# EAGLE board Galaksija keyboard adapter (EAGLE 9.6.2)
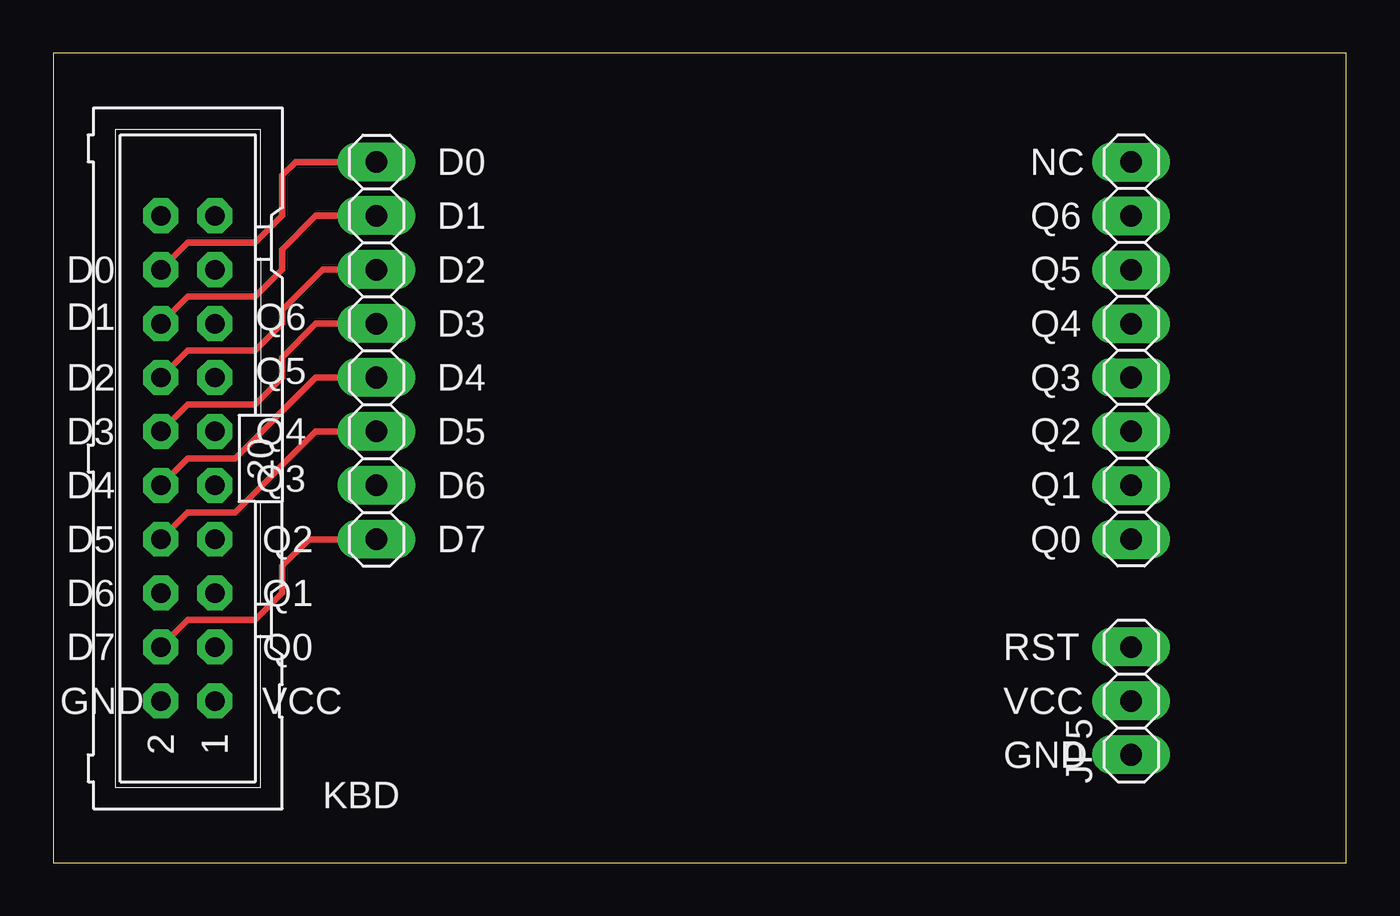
[diagram p0: board, top side]
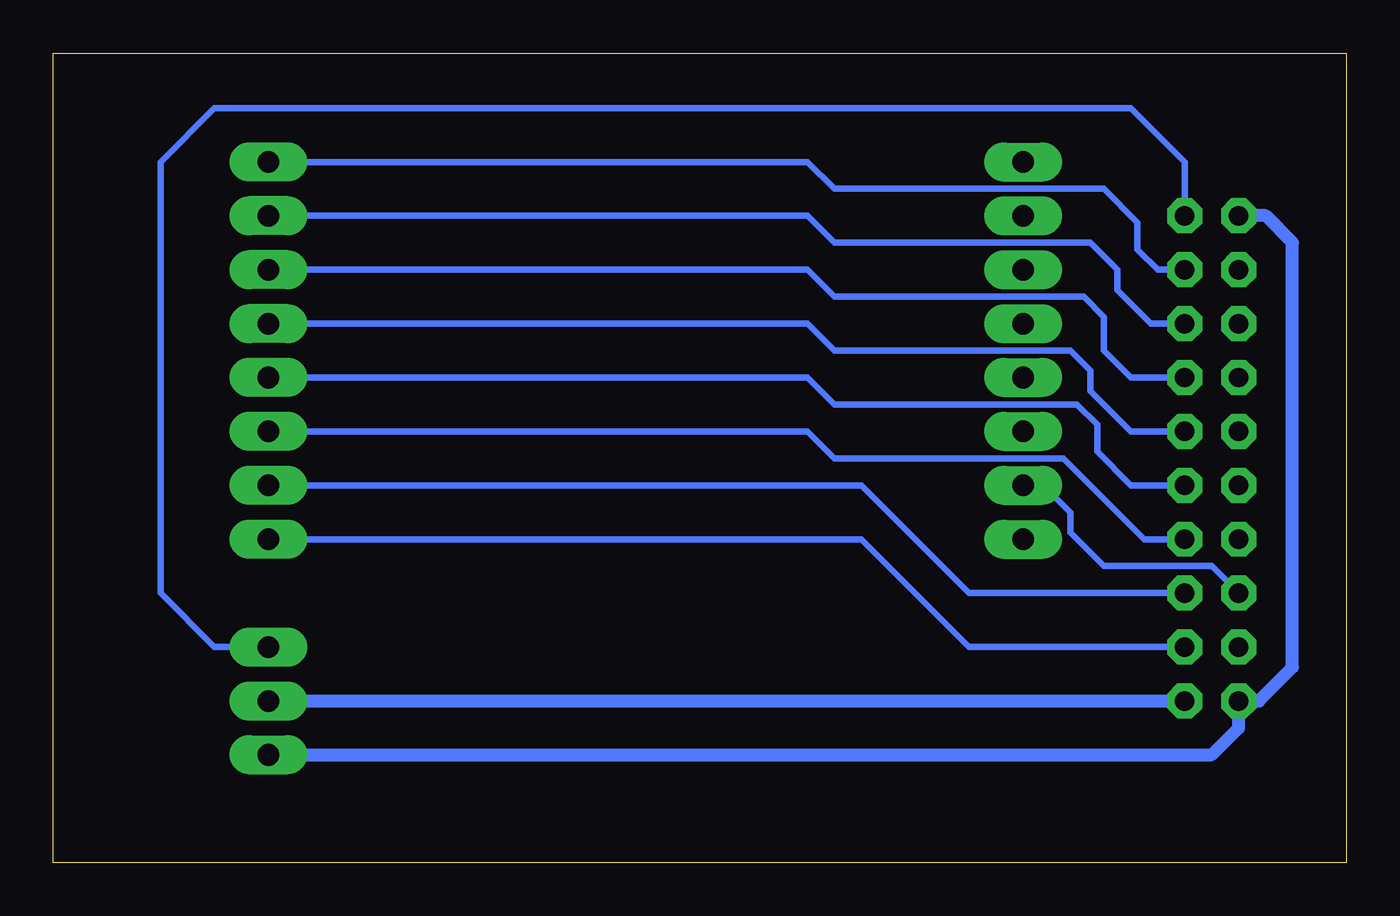
[diagram p1: board, bottom side, seen from below]

Size 60.94 x 38.15 mm. Coordinates in mm from the lower left corner, seen from the top.
Outline: 0,0 60.94,0 60.94,38.15 0,38.15 0,0
Copper layers (1*16): Top 0.035mm / dielectric 1.6mm / Bottom 0.035mm
Design rules "jlcpcb-2layers": minimum track width 5mil, minimum drill 0.3mm, track to track 5mil, track to pad 5mil, pad to pad 5mil, via to via 5mil, smd to smd 5mil, copper to edge 0.2mm, drill to drill 6mil, minimum pad ring 10mil, minimum via ring 3mil, stop-mask expansion 4mil, vias tented up to drill 0mil, thermal gap 10mil

## Footprints (pad centres in the part's own frame; a part is rotated, then mirrored left to right if it is on the bottom)
1X08 = drill 1.016 long: 1 -8.89,0; 2 -6.35,0; 3 -3.81,0; 4 -1.27,0; 5 1.27,0; 6 3.81,0; 7 6.35,0; 8 8.89,0
ML20 = drill 0.914 octagon: 1 -11.43,-1.27; 2 -11.43,1.27; 3 -8.89,-1.27; 4 -8.89,1.27; 5 -6.35,-1.27; 6 -6.35,1.27; 7 -3.81,-1.27; 8 -3.81,1.27; 9 -1.27,-1.27; 10 -1.27,1.27; 11 1.27,-1.27; 12 1.27,1.27; 13 3.81,-1.27; 14 3.81,1.27; 15 6.35,-1.27; 16 6.35,1.27; 17 8.89,-1.27; 18 8.89,1.27; 19 11.43,-1.27; 20 11.43,1.27
1X03 = drill 1.016 long: 1 -2.54,0; 2 0,0; 3 2.54,0

## Placement (x,y rotation side)
JP1  X3  [1X08]  15.24,24.13 90 top
JP2  X2  [1X08]  50.8,24.13 270 top
JP3  KDB  [ML20]  6.35,19.05 90 top
JP5  PWR  [1X03]  50.8,7.62 90 top

## Library data of the parts
JP1 JP2 JP5 = pinhead
JP3 = con-harting-ml; OC_FARNELL: unknown; OC_NEWARK: unknown

## Nets
D0: JP1.8 JP3.18
D1: JP1.7 JP3.16
D2: JP1.6 JP3.14
D3: JP1.5 JP3.12
D4: JP1.4 JP3.10
D5: JP1.3 JP3.8
D6: JP1.2 JP3.6
D7: JP1.1 JP3.4
GND: JP3.2 JP3.20 JP5.1
NC: JP2.1 JP3.17
Q0: JP2.8 JP3.3
Q1: JP2.7 JP3.5
Q2: JP2.6 JP3.7
Q3: JP2.5 JP3.9
Q4: JP2.4 JP3.11
Q5: JP2.3 JP3.13
Q6: JP2.2 JP3.15
RST: JP3.19 JP5.3
VCC: JP3.1 JP5.2

## Tracks (layer width: path | path; a pad name or v marks a point on that pad's centre or on a via)
D0
  Top 0.305: JP1.8 11.43,33.02 10.79,32.38 10.79,30.48 9.53,29.21 6.35,29.21 JP3.18
D1
  Top 0.305: JP3.16 6.35,26.67 9.53,26.67 10.79,27.94 10.79,28.89 12.38,30.48 JP1.7
D2
  Top 0.305: JP3.14 6.35,24.13 9.53,24.13 10.79,25.4 10.79,26.04 12.7,27.94 JP1.6
D3
  Top 0.305: JP3.12 6.35,21.59 9.53,21.59 10.79,22.86 10.79,23.81 12.38,25.4 JP1.5
D4
  Top 0.305: JP3.10 6.35,19.05 8.57,19.05 12.38,22.86 JP1.4
D5
  Top 0.305: JP3.8 6.35,16.51 8.57,16.51 12.38,20.32 JP1.3
D6
  Bottom 0.305: JP3.6 6.35,13.97 11.43,13.97 13.02,15.56 13.02,16.51 14.29,17.78 JP1.2
D7
  Top 0.305: JP3.4 6.35,11.43 9.53,11.43 10.79,12.7 10.79,13.97 12.06,15.24 JP1.1
GND
  Bottom 0.61: JP5.1 6.35,5.08 5.08,6.35 JP3.2 4.13,7.62 2.54,9.21 2.54,29.21 3.81,30.48 JP3.20
NC
  Bottom 0.305: JP3.17 8.89,27.94 9.84,28.89 9.84,30.16 11.43,31.75 24.13,31.75 25.4,33.02 JP2.1
Q0
  Bottom 0.305: JP3.3 17.78,10.16 22.86,15.24 JP2.8
Q1
  Bottom 0.305: JP3.5 17.78,12.7 22.86,17.78 JP2.7
Q2
  Bottom 0.305: JP3.7 9.53,15.24 13.34,19.05 24.13,19.05 25.4,20.32 JP2.6
Q3
  Bottom 0.305: JP3.9 10.16,17.78 11.75,19.37 11.75,20.64 12.7,21.59 24.13,21.59 25.4,22.86 JP2.5
Q4
  Bottom 0.305: JP3.11 10.16,20.32 12.06,22.23 12.06,23.18 13.02,24.13 24.13,24.13 25.4,25.4 JP2.4
Q5
  Bottom 0.305: JP3.13 10.16,22.86 11.43,24.13 11.43,25.72 12.38,26.67 24.13,26.67 25.4,27.94 JP2.3
Q6
  Bottom 0.305: JP3.15 9.21,25.4 10.79,26.99 10.79,27.94 12.06,29.21 24.13,29.21 25.4,30.48 JP2.2
RST
  Bottom 0.305: JP5.3 53.34,10.16 55.88,12.7 55.88,33.02 53.34,35.56 10.16,35.56 7.62,33.02 JP3.19
VCC
  Bottom 0.61: JP5.2 JP3.1

## Text on the board
tPlace: D0 | NC | D1 | Q6 | D0 | D2 | Q5 | D1 | Q6 | D3 | Q4 | Q5 | D2 | D4 | Q3 | D3 | Q4 | D5 | Q2 | D4 | Q3 | D6 | Q1 | D5 | Q2 | D7 | Q0 | D6 | Q1 | D7 | Q0 | RST | GND | VCC | VCC | GND | KBD